# Altium PCB PCB_电脑CPU温度控制_2022-04-25.pcbdoc
Units mm, origin at the board's own origin, x right, y up, seen from the top; angles counter-clockwise.
Board outline 86.61 x 55.31 mm, 2 copper layers (Top Layer, Bottom Layer); 25 components, 22 nets, 133 pads, 71 vias.
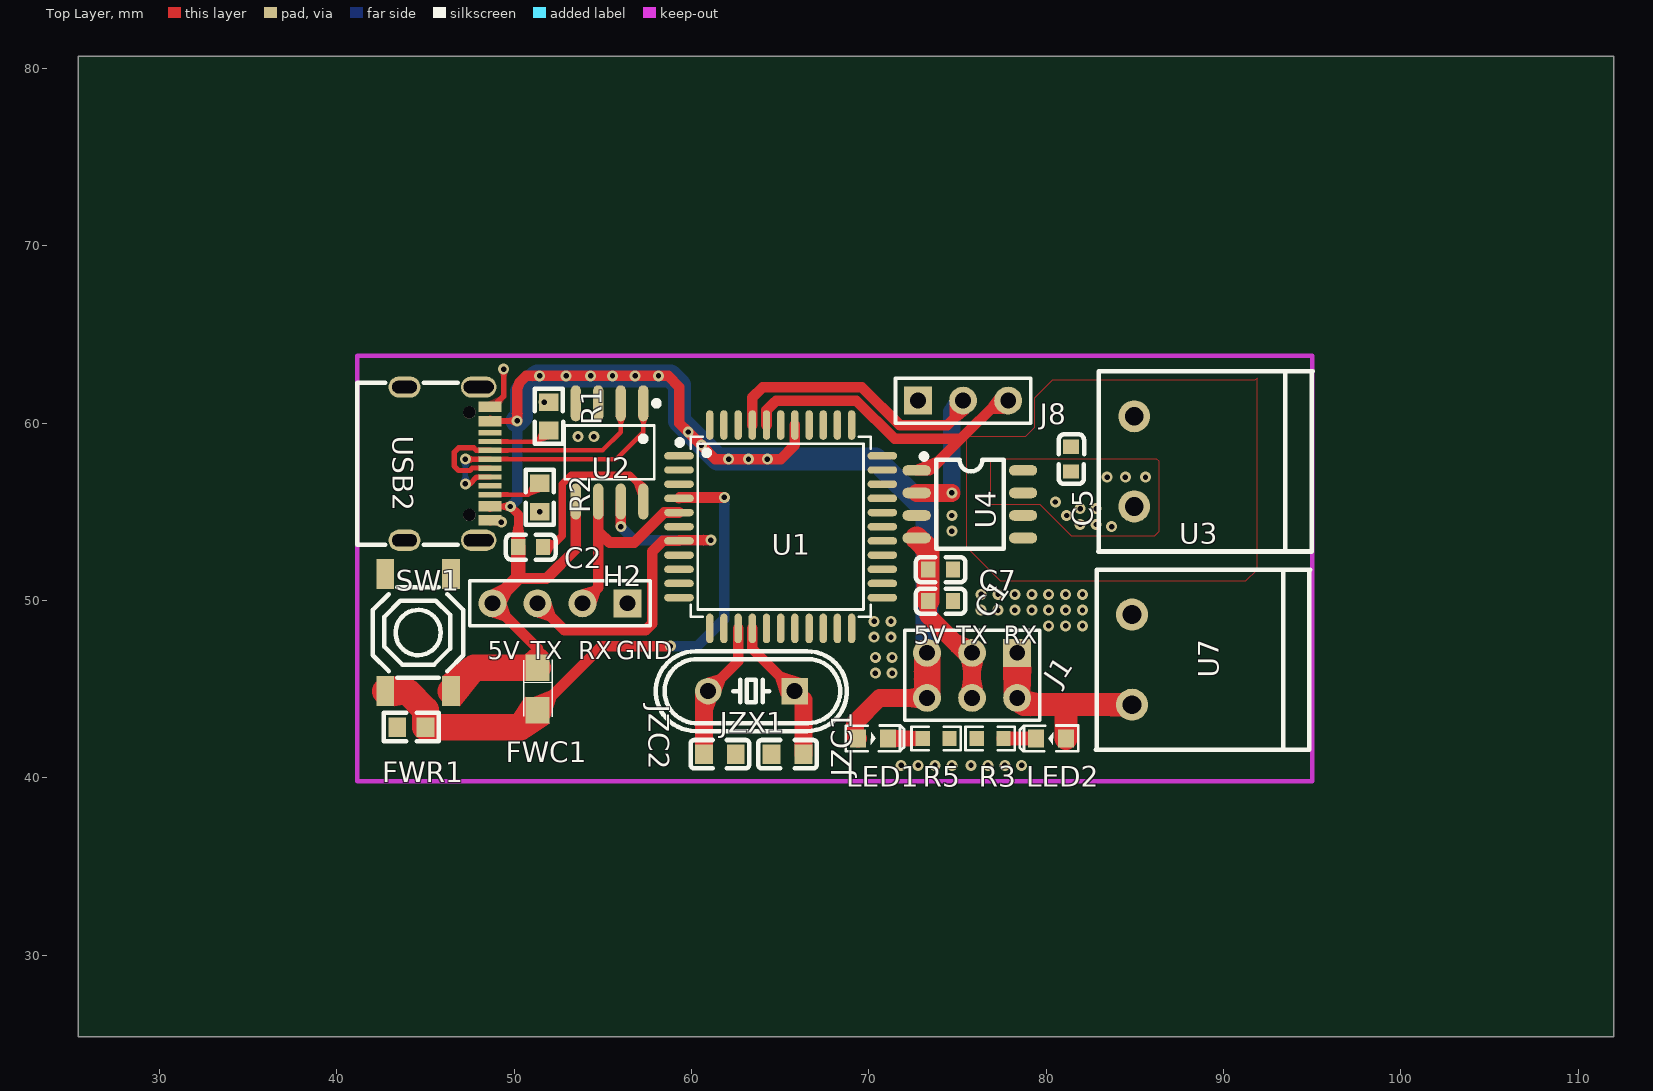
[diagram p0: Top Layer view]
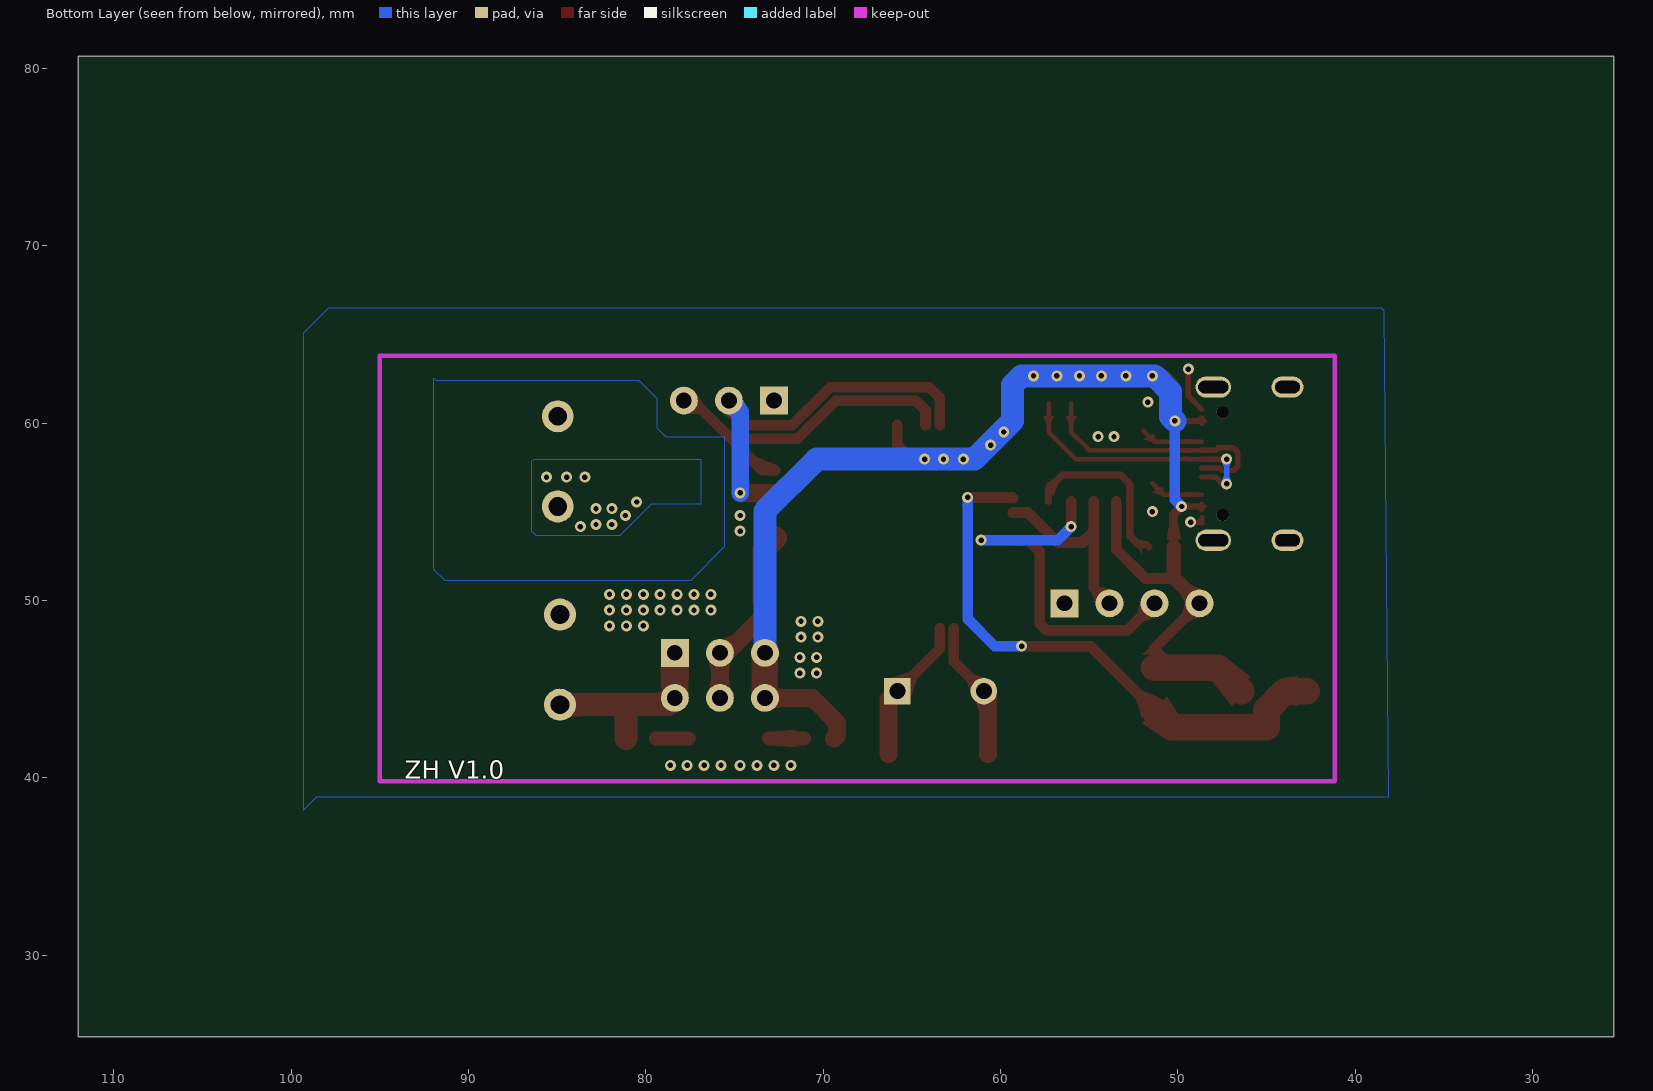
[diagram p1: Bottom Layer view, seen from below]

## Layer stack, top to bottom
Top Layer: signal copper (thickness not stored)
Dielectric: dielectric 0.32, FR-4, Dk 4.8
Bottom Layer: signal copper (thickness not stored)

## Board outline
112.014,25.4 25.4,25.4 25.4,80.708 112.014,80.708

## Components (designator, comment, footprint, x,y, rotation, side; value= is the part's Value field where it differs from the comment)
C1 "10UF" C0603#1 74.041,49.974 r180 top
C2 "100nf" C0603#1 50.927,53.023 r180 top
C5 "100nF" C0603#1 81.407,57.975 r270 top
C7 "100nF" C0603#1 74.041,51.752 r180 top
FWC1 "10uF" CASE-A_3216 51.309,45.021 r270 top
FWR1 "10k" R0603#1 44.196,42.862 r0 top
H2 "HDR-F-2.54_1x4" HDR-F-2.54_1X4 52.578,49.847 r180 top
J1 "HDR-M-2.54_2x3" HDR-M-2.54_2X3 78.359,47.053 r180 top
J8 "HDR-M-2.54_1x3" HDR-M-2.54_1X3 75.311,61.277 r0 top
JZC1 "22pf" C0603#2 65.405,41.338 r0 top
JZC2 "22pf" C0603#2 61.595,41.338 r180 top
JZX1 "12MHz" HC-49US_L11.5-W4.5-P4.88 63.373,44.895 r180 top
LED1 "LED-0603_R" LED0603_RED 70.231,42.227 r0 top
LED2 "LED-0603_R" LED0603_RED 80.264,42.227 r180 top
R1 "5.1k" R0603#1 51.943,60.389 r270 top
R2 "5.1k" R0603#1 51.435,55.816 r270 top
R3 "10k" R0603#2 76.835,42.227 r0 top
R5 "10k" R0603#2 73.787,42.227 r180 top
SW1 "TS-1187A-B-B-B" SW-SMD_4P-L5.1-W5.1-P3.70-LS6.5-TL-2 44.577,48.197 r270 top
U1 "C8707-40I_C8707" LQFP-44_L10.0-W10.0-P0.80-LS12.0-BL 65.024,54.165 r270 top
U2 "CH340N" SOP-8_L5.0-W4.0-P1.27-LS6.0-BL 55.372,58.356 r180 top
U3 "JL127R-50802G01" CONN-TH_3P-P5.08_JL127R-50802G01 84.963,57.848 r90 top
U4 "RZ7889" SOP-8_L4.9-W3.9-P1.27-LS6.0-BL 75.692,55.435 r270 top
U7 "JL127R-50802G01" CONN-TH_3P-P5.08_JL127R-50802G01 84.836,46.672 r90 top
USB2 "KH-TYPE-C-16P" USB-C-SMD_KH-TYPE-C-16P 46.228,57.721 r270 top

## Footprints (in the part's own frame and the unit in brackets; to place one, negate y for a bottom-side part, rotate by r counter-clockwise, add the part's x,y. Pads: shape width x height; smd on the part's side, far side on the other; paste and mask are expansions set on the pad)
C0603#1 [mm]
  rect 0.8x0.9 smd: 1(-0.7,0) 2(0.7,0)
  silkscreen extent -1.4,-0.7 1.4,0.72
C0603#2 [mm]
  rect 1x1.1 smd: 1(-0.9,0) 2(0.9,0)
  silkscreen extent -1.65,-0.8 1.65,0.8
CASE-A_3216 [mm]
  rect 1.5x1.359 smd: 1(-1.2,0) 2(1.2,0)
  silkscreen extent -1.64,-0.76 1.56,0.84
CONN-TH_3P-P5.08_JL127R-50802G01 [mm]
  round 1.8 hole 1.05: 1(-2.54,0) 2(2.54,0)
  silkscreen extent -5.08,-10.06 5.08,2.03
HC-49US_L11.5-W4.5-P4.88 [mm]
  rect 1.5x1.5 hole 0.9: 1(-2.44,0)
  round 1.5 hole 0.9: 2(2.44,0)
  silkscreen extent -5.39,-2.25 5.39,2.25
HDR-F-2.54_1X4 [mil]
  rect 62x62 hole 35: 1(-150,0)
  round 62 hole 35: 2(-50,0) 3(50,0) 4(150,0)
  silkscreen extent -200,-50 200,50
HDR-M-2.54_1X3 [mil]
  rect 62x62 hole 35: 1(-100,0)
  round 62 hole 35: 2(0,0) 3(100,0)
  silkscreen extent -150,-50 150,50
HDR-M-2.54_2X3 [mil]
  rect 62x62 hole 35: 1(0,0)
  round 62 hole 35: 2(0,100) 3(100,0) 4(100,100) 5(200,0) 6(200,100)
  silkscreen extent -50,-50 250,150
LED0603_RED [mm]
  rect 0.9x1 smd: 1(-0.85,0) 2(0.85,0)
  silkscreen extent -1.54,-0.73 1.75,0.73
LQFP-44_L10.0-W10.0-P0.80-LS12.0-BL [mm]
  oval 0.42x1.67 smd: 1(-4,-5.735) 2(-3.2,-5.735) 3(-2.4,-5.735) 4(-1.6,-5.735) 5(-0.8,-5.735) 6(0,-5.735) 7(0.8,-5.735) 8(1.6,-5.735) 9(2.4,-5.735) 10(3.2,-5.735) 11(4,-5.735) 23(4,5.735) 24(3.2,5.735) 25(2.4,5.735) 26(1.6,5.735) 27(0.8,5.735) 28(0,5.735) 29(-0.8,5.735) 30(-1.6,5.735) 31(-2.4,5.735) 32(-3.2,5.735) 33(-4,5.735)
  oval 1.67x0.42 smd: 12(5.735,-4) 13(5.735,-3.2) 14(5.735,-2.4) 15(5.735,-1.6) 16(5.735,-0.8) 17(5.735,0) 18(5.735,0.8) 19(5.735,1.6) 20(5.735,2.4) 21(5.735,3.2) 22(5.735,4) 34(-5.735,4) 35(-5.735,3.2) 36(-5.735,2.4) 37(-5.735,1.6) 38(-5.735,0.8) 39(-5.735,0) 40(-5.735,-0.8) 41(-5.735,-1.6) 42(-5.735,-2.4) 43(-5.735,-3.2) 44(-5.735,-4)
  silkscreen extent -5.08,-5.85 5.08,5.08
R0603#1 [mm]
  rect 1x1.1 smd: 1(-0.8,0) 2(0.8,0)
  silkscreen extent -1.55,-0.8 1.55,0.81
R0603#2 [mm]
  rect 0.806x0.864 smd: 1(-0.753,0) 2(0.753,0)
  silkscreen extent -1.39,-0.66 1.39,0.66
SOP-8_L4.9-W3.9-P1.27-LS6.0-BL [mm]
  oval 0.6x1.6 smd: 1(-1.905,-3) 2(-0.635,-3) 3(0.635,-3) 4(1.905,-3) 5(1.905,3) 6(0.635,3) 7(-0.635,3) 8(-1.905,3)
  silkscreen extent -2.84,-2.74 2.5,1.9
SOP-8_L5.0-W4.0-P1.27-LS6.0-BL [mm]
  oval 0.574x2.036 smd: 1(-1.905,-2.768) 2(-0.635,-2.768) 3(0.635,-2.768) 4(1.905,-2.768) 5(1.905,2.768) 6(0.635,2.768) 7(-0.635,2.768) 8(-1.905,2.768)
  silkscreen extent -2.79,-2.92 2.53,1.52
SW-SMD_4P-L5.1-W5.1-P3.70-LS6.5-TL-2 [mm]
  rect 1.7x1 smd: 1(-3.3,1.849) 2(3.3,1.85) 3(-3.3,-1.85) 4(3.3,-1.85)
  silkscreen extent -2.55,-2.55 2.55,2.55
USB-C-SMD_KH-TYPE-C-16P [mm]
  oval 1.2x2 hole 0.7 slot 1.7 at 90 deg: 1(-4.32,1.765) 2(4.32,1.765)
  oval 1.2x1.8 hole 0.7 slot 1.4 at 90 deg: 3(-4.32,-2.415) 4(4.32,-2.415)
  rect 0.3x1.3 smd: A1(-3.35,2.415) A4(-2.55,2.415) A5(-1.25,2.415) A6(-0.25,2.415) A7(0.25,2.415) A8(1.25,2.415) A9(2.55,2.415) A12(3.35,2.415) B1(3.05,2.415) B4(2.25,2.415) B5(1.75,2.415) B6(0.75,2.415) B7(-0.75,2.415) B8(-1.75,2.415) B9(-2.25,2.415) B12(-3.05,2.415)
  round 0.7 hole 0.7 unplated: ""(-2.89,1.235) ""(2.89,1.235)
  silkscreen extent -4.57,-5.08 4.57,0.57

## Via types
v1: diameter 0.62, hole 0.305, Top Layer to Bottom Layer, tented both sides, 71 vias

## Nets (pads, with @x,y where several pads share a name; then routed paths per layer and width w, separated by ;. In a path a pad name is that pad's centre, name@x,y a point inside that pad or via, vN(x,y) a via of type N, cw(c..) or ccw(c..) an arc to the next point about the centre after c; other vN are vias at no path point)
5V: C2.2 FWC1.1 H2.4 J1.5 J1.6 LED1.1 SW1.2 U1.38 U2.5 USB2.A4 USB2.A9 USB2.B4 USB2.B9 | length 106
  Top Layer w0.254: USB2.A9 USB2.B4 ; USB2.B9 USB2.A4
  Top Layer w0.35: USB2.A9 48.781,55.308 v1(49.784,55.308) ; USB2.A4 48.781,60.134 v1(50.165,60.134)
  Top Layer w0.5: v1(49.784,55.308) 50.228,54.864 C2.2@50.228,53.023
  Top Layer w0.6: v1(50.165,60.134) 50.165,61.912 50.305,62.306 50.673,62.674 v1@51.427,62.674 ; FWC1.1 51.308,47.307 H2.4 50.165,51.244 51.816,51.244 53.467,52.895 U2.5 ; v1@51.429,62.674 v1(52.926,62.674) v1(54.31,62.674) v1(55.54,62.674) v1(56.815,62.674) v1(58.135,62.674) 58.674,62.674 59.309,62.039 59.309,60.008 v1(59.811,59.506) v1(60.546,58.771) 61.341,57.975 v1(62.088,57.975) v1(63.211,57.975) v1(64.274,57.975) 65.024,57.975 65.824,58.776 U1.38
  Top Layer w0.8: H2.4 50.228,51.308 C2.2@50.228,53.023
  Top Layer w1: LED1.1 69.215,42.393 69.215,43.116 70.612,44.514 J1.6
  Top Layer w1.5: SW1.2 47.752,46.22 FWC1.1 ; J1.6@73.279,44.767 J1.5
  Bottom Layer w0.35: v1(49.784,55.308) 50.165,55.689 v1(50.165,60.134)
  Bottom Layer w0.6: v1(49.784,55.308) 50.165,55.689 v1(50.165,60.134)
  Bottom Layer w1.3: v1(50.165,60.134) 50.419,60.389 50.419,61.785 51.308,62.674 58.801,62.674 59.309,62.166 59.309,60.134 61.468,57.975 70.358,57.975 73.279,55.054 J1.5
  other v1: 51.429,62.674
D+: U2.1 USB2.A6 USB2.B6 | length 15.2
  Top Layer w0.254: USB2.A6 55.748,57.97 57.277,59.499 U2.1
  Top Layer w0.3: v1(47.244,56.578) 47.498,56.578 47.879,56.959 47.978,56.959 USB2.B6 ; v1(47.244,57.975) 48.638,57.975 USB2.A6
  Bottom Layer w0.3: v1(47.244,56.578) v1(47.244,57.975)
D-: U2.2 USB2.A7 USB2.B7 | length 14.6
  Top Layer w0.254: USB2.B7 54.978,58.471 56.007,59.499 U2.2
  Top Layer w0.3: USB2.A7 47.63,57.473 47.498,57.34 46.863,57.34 46.609,57.594 46.609,58.356 46.863,58.61 47.714,58.61 47.841,58.483 USB2.B7
GND: C1.1 C7.1 FWR1.1 H2.1 J8.1 JZC1.1 JZC2.1 R1.1 R2.2 R3.1 R5.1 U1.16 U2.3 U4.3 U7.2 USB2.A1 USB2.A12 USB2.B1 USB2.B12 | length 3.6
  Top Layer w0.3: USB2.B1 USB2.A12 48.691,54.419 v1(49.276,54.419) ; USB2.B12 49.403,61.531 v1(49.403,63.055)
  other v1: 71.819,40.703 72.771,40.703 73.724,40.703 74.676,40.703 75.755,40.703 76.708,40.703 77.66,40.703 78.613,40.703 70.358,45.91 71.31,45.91 70.358,46.799 71.31,46.799 70.294,47.942 71.247,47.942 80.137,48.578 81.09,48.578 82.042,48.578 70.294,48.831 71.247,48.831 76.327,49.466 77.279,49.466 78.232,49.466 79.184,49.466 80.137,49.466 81.09,49.466 82.042,49.466 76.327,50.355 77.279,50.355 78.232,50.355 79.184,50.355 80.137,50.355 81.09,50.355 82.042,50.355 74.676,53.911 74.676,54.8 51.435,55.016 53.594,59.245 54.483,59.245 51.689,61.188
INA: J8.3 U1.40 U4.1 | length 19.7
  Top Layer w0.6: U1.40 64.224,60.731 64.643,61.151 64.77,61.277 69.291,61.277 71.45,59.118 75.184,59.118 ; U4.1 73.406,57.34 75.184,59.118 ; J8.3 77.343,61.277 75.184,59.118
INB: J8.2 U1.41 U4.2 | length 22.9
  Top Layer w0.6: U1.41 63.424,61.455 64.008,62.039 69.596,62.039 71.755,59.88 74.422,59.88 75.311,60.77 J8.2
  Top Layer w1: U4.2 v1(74.676,56.07)
  Bottom Layer w1: v1(74.676,56.07) 74.676,60.642 J8.2
LED1_2: LED1.2 R5.2 | length 2
  Top Layer w0.8: LED1.2 R5.2
MCU_RXD: H2.2 U1.5 U2.6 | length 13.3
  Top Layer w0.6: H2.2 54.737,50.736 U2.6 54.737,53.911 55.372,53.276 56.769,53.276 58.458,54.966 U1.5
MCU_TXD: H2.3 U1.7 U2.7 | length 21.6
  Top Layer w0.6: H2.3 52.832,48.323 57.404,48.323 57.785,48.704 57.785,52.768 58.382,53.365 U1.7 59.327,53.404 v1(61.087,53.404) ; v1@56.007,54.285 U2.7
  Bottom Layer w0.6: v1(56.007,54.165) 56.769,53.404 v1(61.087,53.404)
MOTOA: C5.2 U3.1 U4.7 U4.8
  other v1: 83.693,54.165 81.915,54.292 82.804,54.292 81.153,54.8 81.915,55.181 82.804,55.181 80.518,55.562 83.439,56.959 84.455,56.959 85.598,56.959
MOTOB: C5.1 U3.2 U4.5 U4.6
R3_2: LED2.2 R3.2 | length 1.8
  Top Layer w0.8: R3.2 LED2.2
RST: FWC1.2 FWR1.2 SW1.4 U1.4 | length 32.5
  Top Layer w0.6: FWC1.2 54.922,47.434 v1(58.801,47.434) ; U1.4 59.34,55.816 v1(61.849,55.816)
  Top Layer w1.5: SW1.4 43.939,44.897 44.996,43.84 FWR1.2 50.348,42.862 FWC1.2
  Bottom Layer w0.6: v1(58.801,47.434) 60.325,47.434 61.849,48.959 v1(61.849,55.816)
RZ_VCC: C1.2 C7.2 J1.3 J1.4 U4.4 | length 10.3
  Top Layer w1: C1.2 73.341,49.151 75.438,47.053 J1.3 J1.4@75.819,44.767
  Top Layer w1.3: U4.4 73.34,52.883 C7.2 C1.2
S$68: 
S$164: 
U2_8: C2.1 U2.8 | length 10.1
  Top Layer w0.4: C2.1 51.755,53.149 52.197,53.149 52.705,53.657 52.705,56.578 53.213,57.087 56.515,57.087 57.277,56.325 U2.8
USB2_A5: R1.2 USB2.A5 | length 3.6
  Top Layer w0.254: USB2.A5 51.326,58.971 R1.2
USB2_B5: R2.1 USB2.B5 | length 3.1
  Top Layer w0.254: USB2.B5 50.79,55.971 R2.1
VIN: J1.1 J1.2 LED2.1 U7.1 | length 10.9
  Top Layer w1.3: J1.2 78.74,44.133 U7.1 ; LED2.1 81.115,43.962 81.285,44.133
  Top Layer w1.5: J1.2@78.359,44.767 J1.1
XTAL1: JZC1.2 JZX1.1 U1.15 | length 8.3
  Top Layer w0.6: U1.15 63.424,47.282 JZX1.1
  Top Layer w1: JZX1.1 66.304,44.402 JZC1.2
XTAL2: JZC2.2 JZX1.2 U1.14 | length 7.9
  Top Layer w0.6: JZX1.2 62.624,46.586 U1.14
  Top Layer w1: JZC2.2 60.696,44.656 JZX1.2
pads on no net: SW1.1 SW1.3 U1.1 U1.2 U1.3 U1.6 U1.8 U1.9 U1.10 U1.11 U1.12 U1.13 U1.17 U1.18 U1.19 U1.20 U1.21 U1.22 U1.23 U1.24 U1.25 U1.26 U1.27 U1.28 U1.29 U1.30 U1.31 U1.32 U1.33 U1.34 U1.35 U1.36 U1.37 U1.39 U1.42 U1.43 U1.44 U2.4 USB2. USB2.1 USB2.2 USB2.3 USB2.4 USB2.A8 USB2.B8

## Polygon pours and split planes (outlines as drawn)
MOTOA on Bottom Layer (solid): 76.898,57.975 76.898,55.435 79.692,55.435 81.471,53.657 86.169,53.657 86.423,53.911 86.423,57.848 86.296,57.975 76.898,57.975
MOTOB on Bottom Layer (solid): 75.565,59.118 75.565,53.023 77.47,51.117 88.519,51.117 91.313,51.117 91.948,51.752 91.948,62.547 91.821,62.42 80.391,62.42 79.375,61.404 79.375,59.753 78.867,59.245 75.565,59.245
GND on Bottom Layer (solid): 38.354,66.358 38.481,66.484 97.917,66.484 99.314,65.087 99.314,38.163 98.552,38.925 38.1,38.925
MOTOA on Top Layer (solid): 76.835,57.975 76.835,55.435 79.629,55.435 81.407,53.657 86.106,53.657 86.36,53.911 86.36,57.848 86.233,57.975 76.835,57.975
MOTOB on Top Layer (solid): 75.501,59.118 75.501,53.023 77.406,51.117 88.456,51.117 91.249,51.117 91.885,51.752 91.885,62.547 91.757,62.42 80.328,62.42 79.311,61.404 79.311,59.753 78.803,59.245 75.501,59.245
GND on Top Layer (solid): 38.354,66.294 38.481,66.421 97.917,66.421 99.314,65.024 99.314,38.1 98.552,38.862 38.1,38.862

## Other copper
Top Layer:
  region net 5V: 72.758,43.923 72.758,45.104 72.207,45.013 72.207,44.014
  region net RZ_VCC: 75.669,47.827 75.071,46.808 74.633,47.151 75.157,48.042
  region net RZ_VCC: 73.192,53.83 72.192,53.231 72.672,52.631 73.801,53.341
  region net VIN: 79.146,46.266 77.572,46.266 77.609,44.767 79.109,44.767
  region net VIN: 78.95,45.034 77.768,45.034 77.609,45.585 79.109,45.585
  region net VIN: 79.146,46.266 77.572,46.266 77.609,44.767 79.109,44.767
  region net VIN: 78.95,45.034 77.768,45.034 77.609,45.585 79.109,45.585
  region net VIN: 84.241,43.458 84.241,44.807 83.611,44.783 83.611,43.482
  region net VIN: 79.056,44.88 78.636,43.776 79.114,43.482 79.608,44.783
  region net RZ_VCC: 76.41,46.533 75.228,46.533 75.319,45.982 76.319,45.982
  region net RZ_VCC: 76.41,45.034 75.228,45.034 75.319,45.585 76.319,45.585
  region net RZ_VCC: 76.41,46.533 75.228,46.533 75.319,45.982 76.319,45.982
  region net RZ_VCC: 76.41,45.034 75.228,45.034 75.319,45.585 76.319,45.585
  region net 5V: 73.87,46.533 72.688,46.533 72.529,45.982 74.029,45.982
  region net 5V: 73.87,45.034 72.688,45.034 72.529,45.585 74.029,45.585
  region net 5V: 73.87,46.533 72.688,46.533 72.529,45.982 74.029,45.982
  region net 5V: 73.87,45.034 72.688,45.034 72.529,45.585 74.029,45.585
  region net 5V: 49.932,60.34 50.398,60.34 50.465,60.557 49.865,60.557
  region net 5V: 49.96,59.902 49.96,60.367 49.743,60.31 49.743,59.959
  region net 5V: 51.224,62.442 51.224,62.907 51.007,62.974 51.007,62.375
  region net INA: 72.59,57.64 73.729,57.241 74.272,57.782 73.713,58.072
  region net RST: 51.989,43.072 50.63,44.572 49.845,43.419 50.879,42.332
  region net XTAL2: 61.364,44.281 60.27,44.543 60.195,44.022 61.195,43.782
  region net XTAL2: 60.886,45.643 61.682,44.848 61.867,45.404 61.443,45.829
  region net XTAL1: 65.062,44.587 66.127,45.644 65.17,45.962 64.744,45.539
  region net LED1_2: 71.531,42.728 71.531,41.727 72.731,41.828 72.731,42.627
  region net LED1_2: 72.63,41.796 72.63,42.659 71.43,42.627 71.43,41.828
  region net R3_2: 78.964,41.852 78.964,42.603 78.514,42.377 78.514,42.078
  region net USB2_A5: 51.946,59.088 51.392,59.398 51.228,59.053 51.458,58.924
  region net USB2_A5: 49.293,59.121 49.293,58.821 49.674,58.844 49.674,59.098
  region net 5V: 49.827,53.472 50.627,53.472 50.477,54.222 49.977,54.222
  region net 5V: 50.093,55.328 49.765,54.999 49.906,54.833 50.259,55.187
  region net U2_8: 52.027,53.472 52.027,52.65 52.197,52.95 52.197,53.349
  region net U2_8: 56.99,55.912 57.442,56.554 57.008,56.876 56.752,56.566
  region net D-: 56.294,60.394 55.72,60.394 55.88,60.013 56.134,60.013
  region net D-: 49.293,58.622 49.293,58.322 49.674,58.345 49.674,58.599
  region net D+: 57.564,60.394 56.99,60.394 57.15,60.013 57.404,60.013
  region net D+: 49.293,58.121 49.293,57.821 49.674,57.844 49.674,58.098
  region net INB: 75.621,60.554 74.554,61.061 74.563,60.446 75.138,60.173
  region net USB2_B5: 51.438,56.116 50.884,56.425 50.72,56.081 50.95,55.952
  region net USB2_B5: 49.293,56.121 49.293,55.821 49.674,55.844 49.674,56.098
  region net INA: 77.634,60.521 77.127,61.587 76.746,61.105 77.019,60.53
  region net D+: 47.449,57.743 47.449,58.208 47.666,58.125 47.666,57.826
  region net D-: 47.993,58.322 48.668,58.622 48.167,58.628 47.839,58.334
  region net 5V: 49.582,55.08 49.582,55.537 49.369,55.484 49.369,55.133
  region net 5V: 48.96,55.322 48.325,55.322 48.516,55.171 48.77,55.171
  region net 5V: 48.325,55.321 48.96,55.321 48.77,55.472 48.516,55.472
  region net 5V: 48.961,60.121 48.326,60.121 48.516,59.971 48.77,59.971
  region net 5V: 48.326,60.121 48.961,60.121 48.77,60.271 48.516,60.271
  region net RST: 58.596,47.202 58.596,47.667 58.379,47.734 58.379,47.135
  region net RST: 51.116,44.572 51.989,43.351 52.331,44.419 51.978,44.914
  region net MCU_RXD: 53.799,50.633 54.634,49.798 54.818,50.393 54.394,50.818
  region net 5V: 48.719,50.633 49.554,49.798 49.738,50.393 49.314,50.818
  region net 5V: 48.719,49.062 49.554,49.897 49.738,49.302 49.314,48.877
  region net 5V: 50.63,46.972 51.989,46.972 51.608,47.307 51.008,47.307
  region net 5V: 48.719,50.633 49.554,49.798 49.809,50.323 49.243,50.888
  region net 5V: 45.927,45.747 46.927,44.046 48.144,45.553 47.221,46.751
  region net RST: 43.227,45.747 43.227,44.046 43.94,44.147 43.94,45.647
  region net MCU_TXD: 51.259,49.062 52.094,49.897 52.278,49.302 51.854,48.877
  region net MCU_TXD: 60.885,53.175 60.885,53.632 60.672,53.703 60.672,53.104
Bottom Layer:
  region net 5V: 73.87,47.574 72.688,47.574 72.629,48.125 73.929,48.125
  region net 5V: 50.093,55.289 49.765,55.618 49.959,55.731 50.206,55.483
  region net 5V: 49.932,59.929 50.398,59.929 50.34,59.712 49.99,59.712
  region net 5V: 50.093,55.289 49.765,55.618 49.87,55.819 50.295,55.395
  region net 5V: 49.932,59.929 50.398,59.929 50.465,59.712 49.865,59.712
  region net INB: 74.525,61.327 75.36,60.492 75.03,60.289 74.322,60.996
  region net D+: 47.011,57.77 47.477,57.77 47.394,57.553 47.094,57.553
  region net D+: 47.011,56.784 47.477,56.784 47.394,57.001 47.094,57.001
  region net RST: 61.616,55.611 62.082,55.611 62.149,55.394 61.549,55.394
  region net RST: 59.006,47.202 59.006,47.667 59.223,47.734 59.223,47.135
  region net MCU_TXD: 60.885,53.175 60.885,53.632 60.672,53.703 60.672,53.104

## Silkscreen, mask and mechanical layers (free items; w line width, h text height)
Top Overlay:
  text "5V" at 72.517,47.57 h1
  text "TX" at 74.93,47.57 h1
  text "RX" at 77.597,47.57 h1
  text "5V" at 48.514,46.681 h1
  text "TX" at 50.927,46.681 h1
  text "RX" at 53.594,46.681 h1
  text "GND" at 55.753,46.681 h1
Bottom Overlay:
  text "ZH V1.0" at 93.599,39.95 h1